# Altium PCB ESP_mudule.pcbdoc (part 1 of 4)
Units mm, origin at the board's own origin, x right, y up, seen from the top; angles counter-clockwise.
Board outline 109.8 x 135.65 mm, 2 copper layers (Top Layer, Bottom Layer); 176 components, 188 nets, 748 pads, 392 vias.
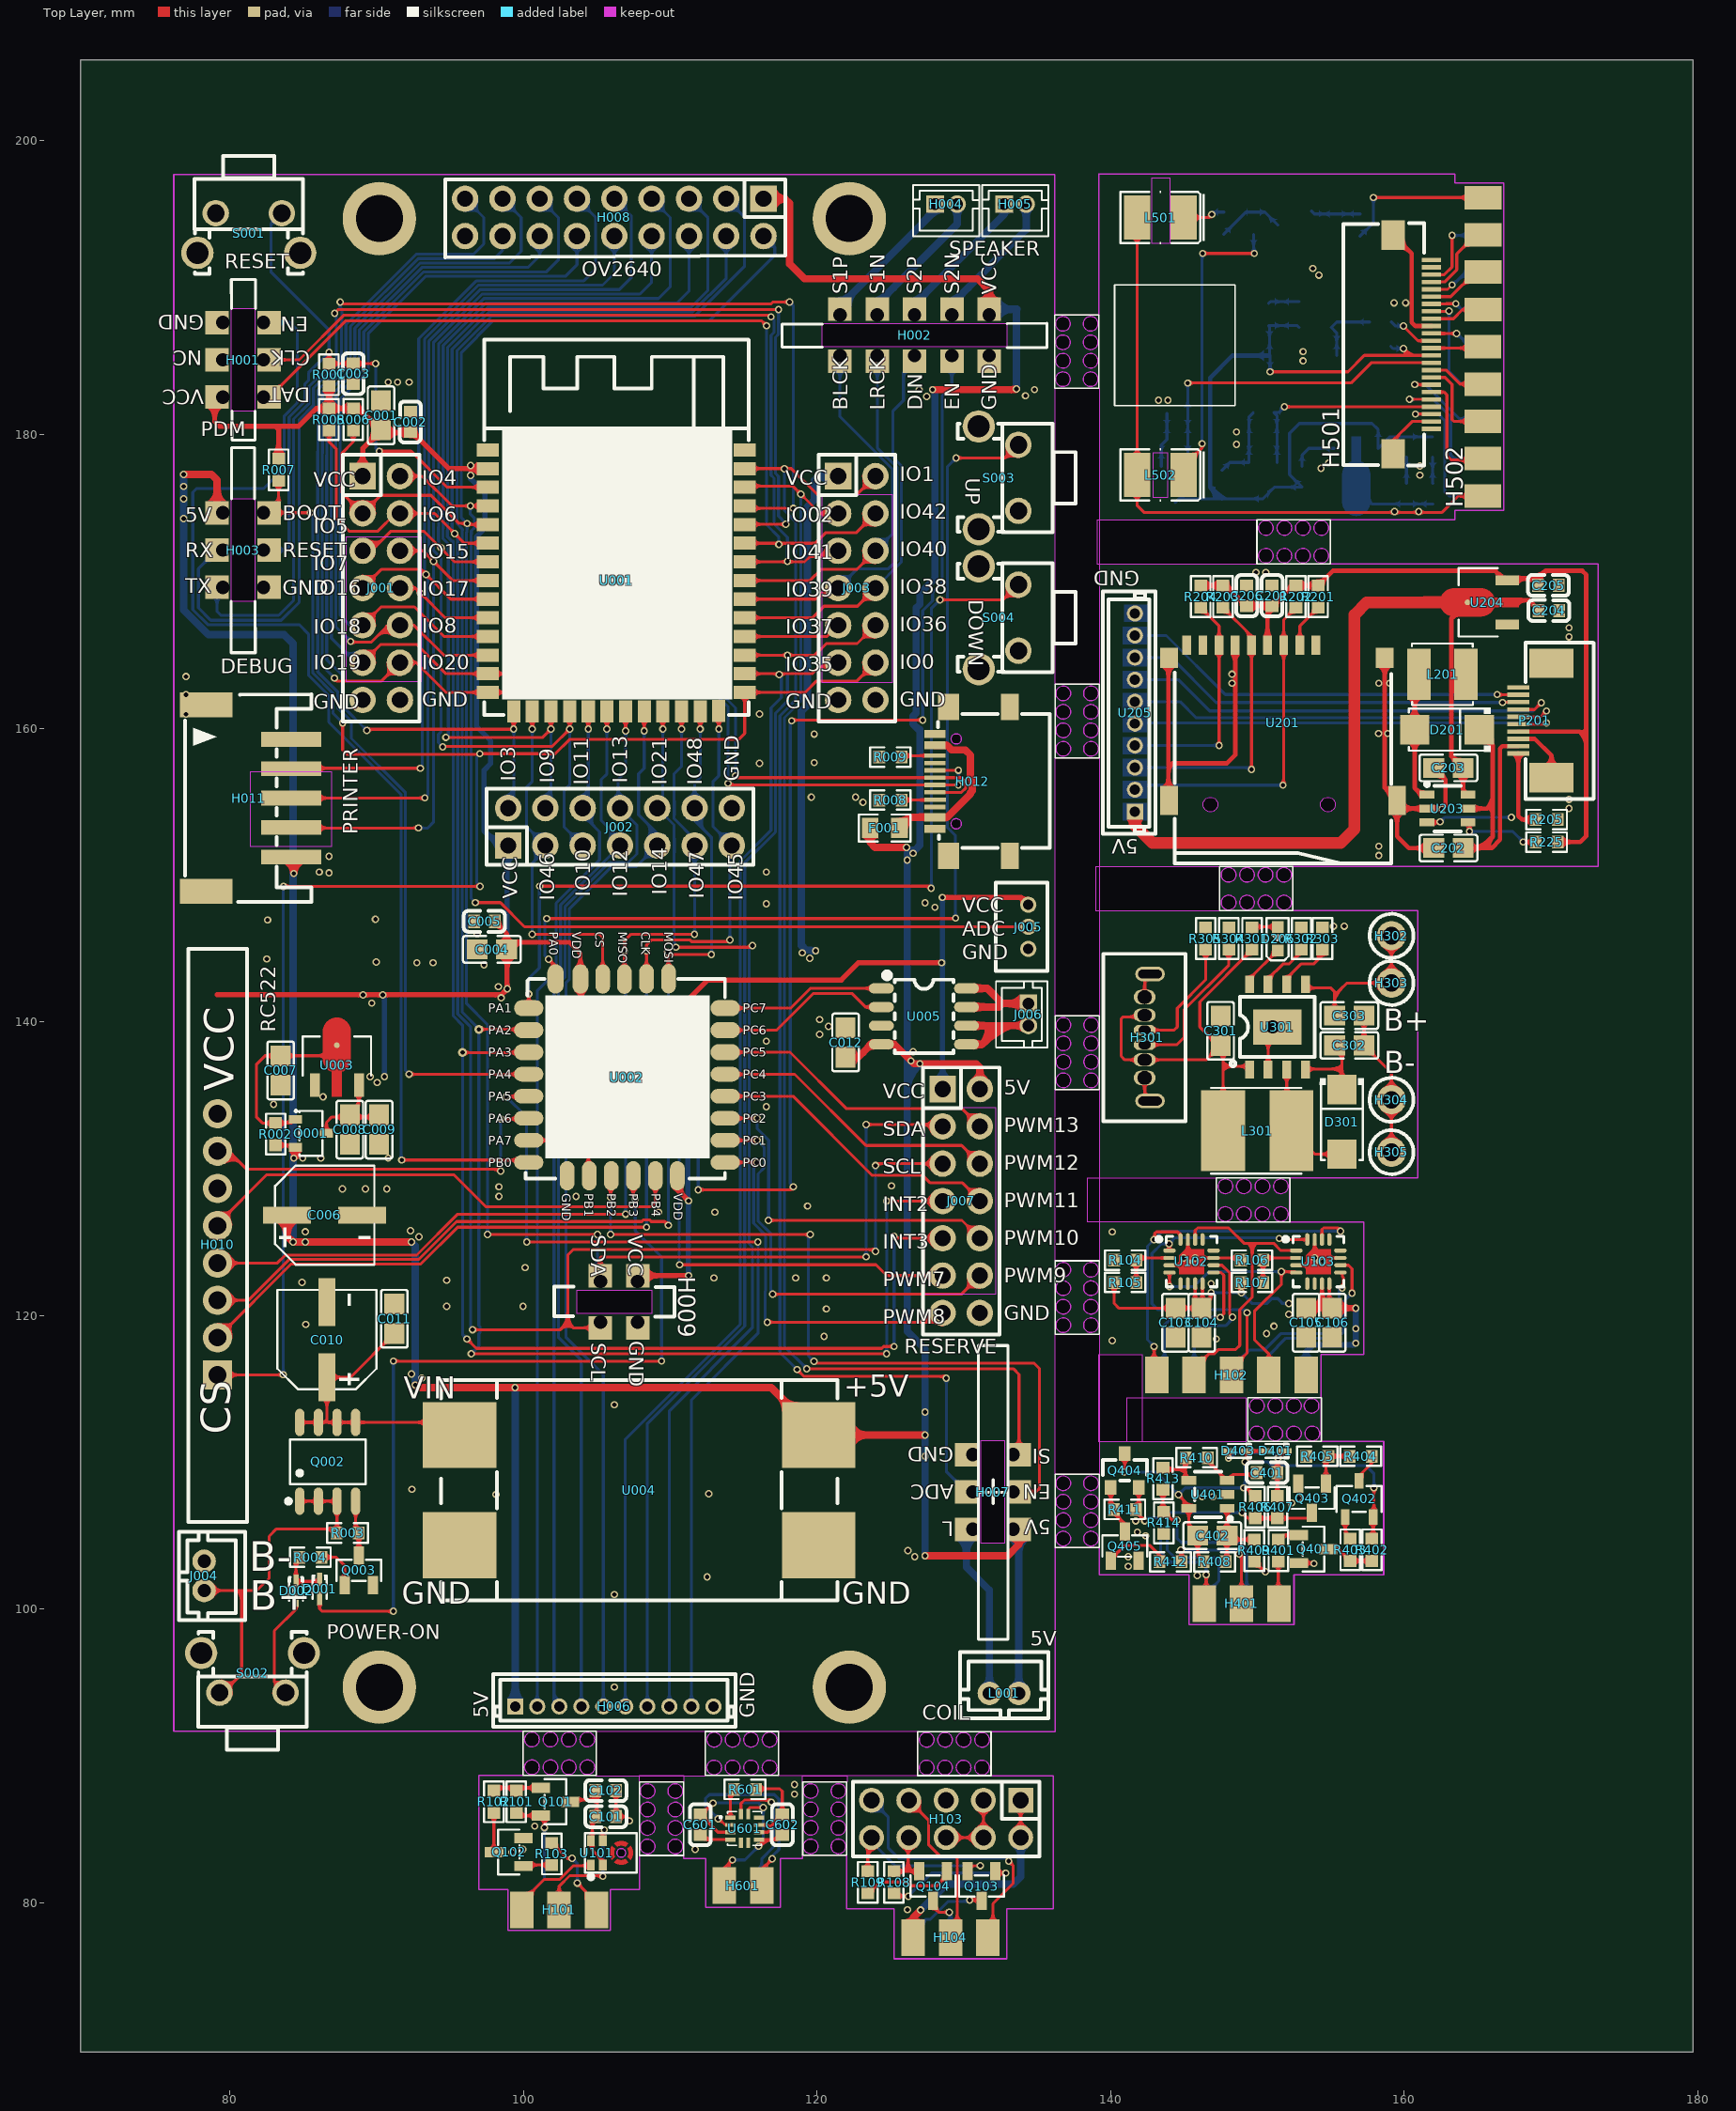
[diagram p0: Top Layer view]
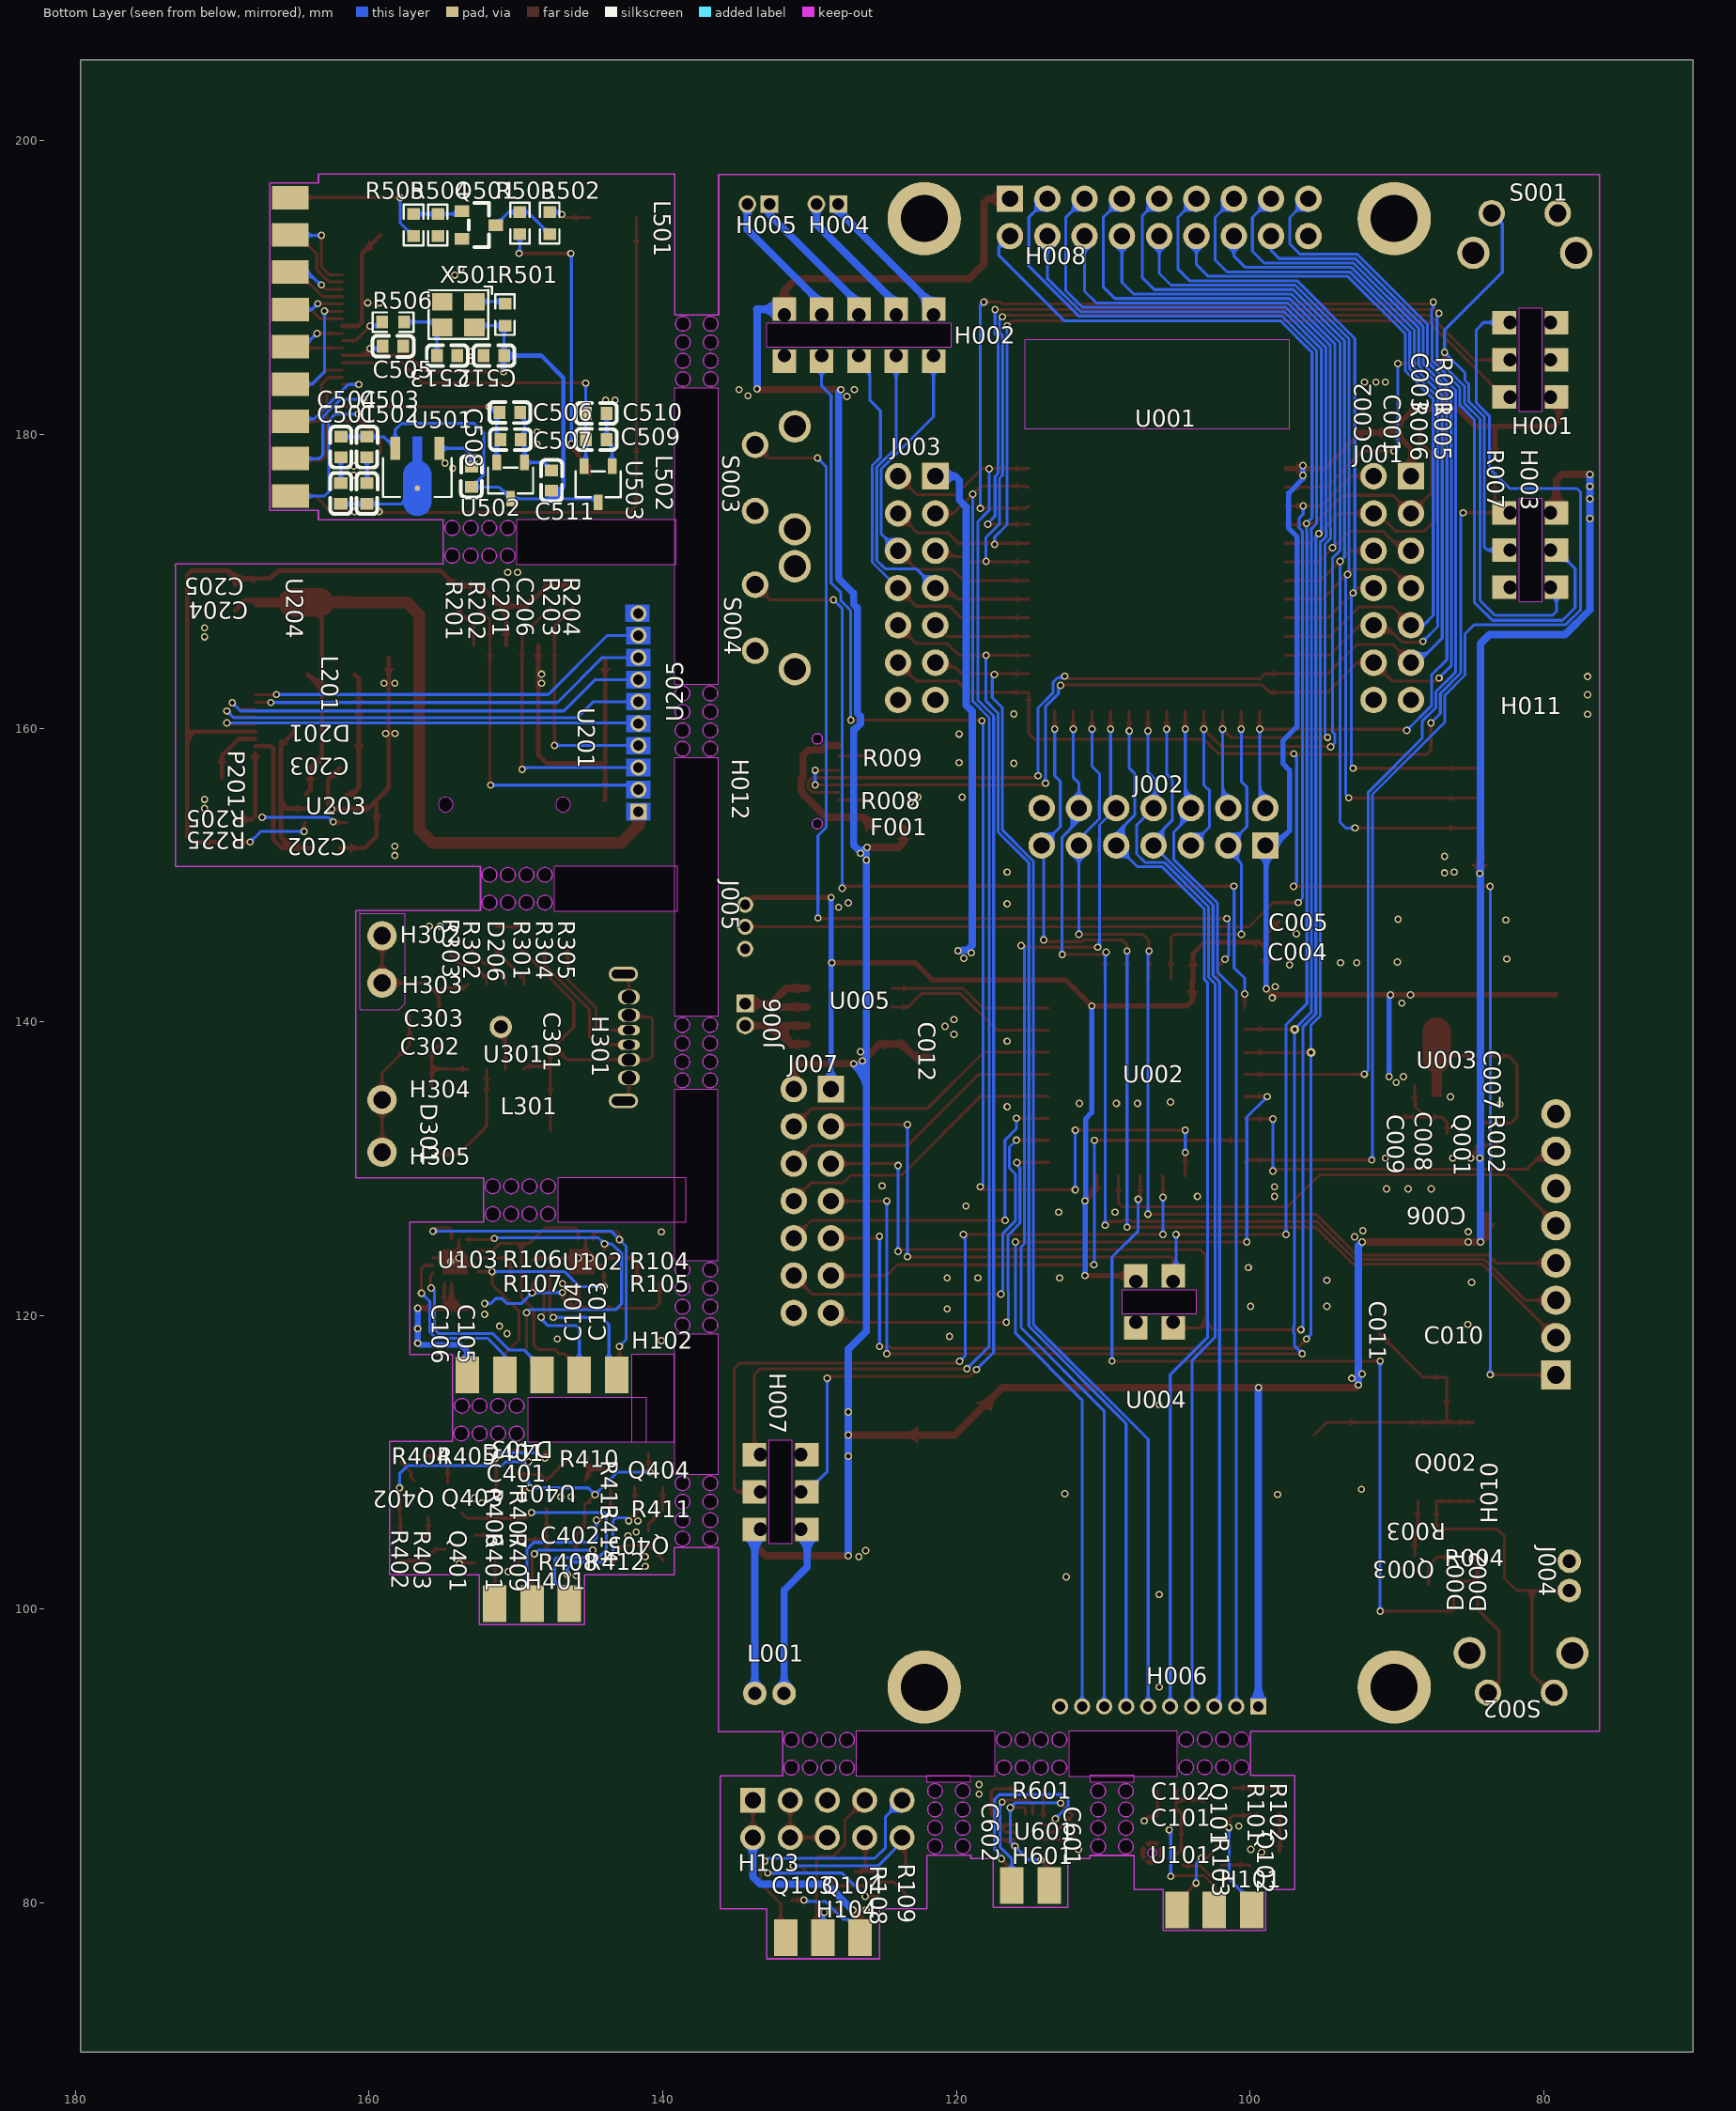
[diagram p1: Bottom Layer view, seen from below]

## Layer stack, top to bottom
Top Layer: signal copper (thickness not stored)
Dielectric: dielectric 0.32, FR-4, Dk 4.8
Bottom Layer: signal copper (thickness not stored)

## Board outline
179.654,69.85 69.85,69.85 69.85,205.503 179.654,205.503
cut-out: 137.249,187.533 cw(c136.749,187.533) 136.249,187.533 cw(c136.749,187.533)
cut-out: 137.249,186.275 cw(c136.749,186.275) 136.249,186.275 cw(c136.749,186.275)
cut-out: 137.249,185.017 cw(c136.749,185.017) 136.249,185.017 cw(c136.749,185.017)
cut-out: 137.249,183.759 cw(c136.749,183.759) 136.249,183.759 cw(c136.749,183.759)
cut-out: 139.139,187.533 cw(c138.639,187.533) 138.139,187.533 cw(c138.639,187.533)
cut-out: 139.139,186.275 cw(c138.639,186.275) 138.139,186.275 cw(c138.639,186.275)
cut-out: 139.139,185.017 cw(c138.639,185.017) 138.139,185.017 cw(c138.639,185.017)
cut-out: 139.139,183.759 cw(c138.639,183.759) 138.139,183.759 cw(c138.639,183.759)
cut-out: 151.07,171.741 cw(c150.57,171.741) 150.07,171.741 cw(c150.57,171.741)
cut-out: 152.328,171.741 cw(c151.828,171.741) 151.328,171.741 cw(c151.828,171.741)
cut-out: 153.586,171.741 cw(c153.086,171.741) 152.586,171.741 cw(c153.086,171.741)
cut-out: 154.844,171.741 cw(c154.344,171.741) 153.844,171.741 cw(c154.344,171.741)
cut-out: 154.844,173.631 cw(c154.344,173.631) 153.844,173.631 cw(c154.344,173.631)
cut-out: 153.586,173.631 cw(c153.086,173.631) 152.586,173.631 cw(c153.086,173.631)
cut-out: 152.328,173.631 cw(c151.828,173.631) 151.328,173.631 cw(c151.828,173.631)
cut-out: 151.07,173.631 cw(c150.57,173.631) 150.07,173.631 cw(c150.57,173.631)
cut-out: 137.268,162.367 cw(c136.768,162.367) 136.268,162.367 cw(c136.768,162.367)
cut-out: 137.268,161.109 cw(c136.768,161.109) 136.268,161.109 cw(c136.768,161.109)
cut-out: 137.268,159.851 cw(c136.768,159.851) 136.268,159.851 cw(c136.768,159.851)
cut-out: 137.268,158.593 cw(c136.768,158.593) 136.268,158.593 cw(c136.768,158.593)
cut-out: 139.158,158.593 cw(c138.658,158.593) 138.158,158.593 cw(c138.658,158.593)
cut-out: 139.158,159.851 cw(c138.658,159.851) 138.158,159.851 cw(c138.658,159.851)
cut-out: 139.158,161.109 cw(c138.658,161.109) 138.158,161.109 cw(c138.658,161.109)
cut-out: 139.158,162.367 cw(c138.658,162.367) 138.158,162.367 cw(c138.658,162.367)
cut-out: 148.529,148.12 cw(c148.029,148.12) 147.529,148.12 cw(c148.029,148.12)
cut-out: 149.787,148.12 cw(c149.287,148.12) 148.787,148.12 cw(c149.287,148.12)
cut-out: 151.045,148.12 cw(c150.545,148.12) 150.045,148.12 cw(c150.545,148.12)
cut-out: 152.303,148.12 cw(c151.803,148.12) 151.303,148.12 cw(c151.803,148.12)
cut-out: 152.303,150.01 cw(c151.803,150.01) 151.303,150.01 cw(c151.803,150.01)
cut-out: 151.045,150.01 cw(c150.545,150.01) 150.045,150.01 cw(c150.545,150.01)
cut-out: 149.787,150.01 cw(c149.287,150.01) 148.787,150.01 cw(c149.287,150.01)
cut-out: 148.529,150.01 cw(c148.029,150.01) 147.529,150.01 cw(c148.029,150.01)
cut-out: 137.284,139.791 cw(c136.784,139.791) 136.284,139.791 cw(c136.784,139.791)
cut-out: 137.284,138.533 cw(c136.784,138.533) 136.284,138.533 cw(c136.784,138.533)
cut-out: 137.284,137.275 cw(c136.784,137.275) 136.284,137.275 cw(c136.784,137.275)
cut-out: 137.284,136.017 cw(c136.784,136.017) 136.284,136.017 cw(c136.784,136.017)
cut-out: 139.174,136.017 cw(c138.674,136.017) 138.174,136.017 cw(c138.674,136.017)
cut-out: 139.174,137.275 cw(c138.674,137.275) 138.174,137.275 cw(c138.674,137.275)
cut-out: 139.174,138.533 cw(c138.674,138.533) 138.174,138.533 cw(c138.674,138.533)
cut-out: 139.174,139.791 cw(c138.674,139.791) 138.174,139.791 cw(c138.674,139.791)
cut-out: 148.316,126.912 cw(c147.816,126.912) 147.316,126.912 cw(c147.816,126.912)
cut-out: 149.574,126.912 cw(c149.074,126.912) 148.574,126.912 cw(c149.074,126.912)
cut-out: 150.832,126.912 cw(c150.332,126.912) 149.832,126.912 cw(c150.332,126.912)
cut-out: 152.09,126.912 cw(c151.59,126.912) 151.09,126.912 cw(c151.59,126.912)
cut-out: 152.09,128.801 cw(c151.59,128.801) 151.09,128.801 cw(c151.59,128.801)
cut-out: 150.832,128.801 cw(c150.332,128.801) 149.832,128.801 cw(c150.332,128.801)
cut-out: 149.574,128.801 cw(c149.074,128.801) 148.574,128.801 cw(c149.074,128.801)
cut-out: 148.316,128.801 cw(c147.816,128.801) 147.316,128.801 cw(c147.816,128.801)
cut-out: 137.268,123.12 cw(c136.768,123.12) 136.268,123.12 cw(c136.768,123.12)
cut-out: 137.268,121.862 cw(c136.768,121.862) 136.268,121.862 cw(c136.768,121.862)
cut-out: 137.268,120.604 cw(c136.768,120.604) 136.268,120.604 cw(c136.768,120.604)
cut-out: 137.268,119.346 cw(c136.768,119.346) 136.268,119.346 cw(c136.768,119.346)
cut-out: 139.157,119.346 cw(c138.657,119.346) 138.157,119.346 cw(c138.657,119.346)
cut-out: 139.157,120.604 cw(c138.657,120.604) 138.157,120.604 cw(c138.657,120.604)
cut-out: 139.157,121.862 cw(c138.657,121.862) 138.157,121.862 cw(c138.657,121.862)
cut-out: 139.157,123.12 cw(c138.657,123.12) 138.157,123.12 cw(c138.657,123.12)
cut-out: 150.458,111.968 cw(c149.958,111.968) 149.458,111.968 cw(c149.958,111.968)
cut-out: 151.716,111.968 cw(c151.216,111.968) 150.716,111.968 cw(c151.216,111.968)
cut-out: 152.974,111.968 cw(c152.474,111.968) 151.974,111.968 cw(c152.474,111.968)
cut-out: 154.232,111.968 cw(c153.732,111.968) 153.232,111.968 cw(c153.732,111.968)
cut-out: 154.181,113.858 cw(c153.681,113.858) 153.181,113.858 cw(c153.681,113.858)
cut-out: 152.974,113.858 cw(c152.474,113.858) 151.974,113.858 cw(c152.474,113.858)
cut-out: 151.716,113.858 cw(c151.216,113.858) 150.716,113.858 cw(c151.216,113.858)
cut-out: 150.458,113.858 cw(c149.958,113.858) 149.458,113.858 cw(c149.958,113.858)
cut-out: 137.268,108.585 cw(c136.768,108.585) 136.268,108.585 cw(c136.768,108.585)
cut-out: 137.268,107.327 cw(c136.768,107.327) 136.268,107.327 cw(c136.768,107.327)
cut-out: 137.268,106.069 cw(c136.768,106.069) 136.268,106.069 cw(c136.768,106.069)
cut-out: 137.268,104.811 cw(c136.768,104.811) 136.268,104.811 cw(c136.768,104.811)
cut-out: 139.157,104.811 cw(c138.657,104.811) 138.157,104.811 cw(c138.657,104.811)
cut-out: 139.157,106.069 cw(c138.657,106.069) 138.157,106.069 cw(c138.657,106.069)
cut-out: 139.157,107.327 cw(c138.657,107.327) 138.157,107.327 cw(c138.657,107.327)
cut-out: 139.157,108.585 cw(c138.657,108.585) 138.157,108.585 cw(c138.657,108.585)
cut-out: 127.966,89.222 cw(c127.466,89.222) 126.966,89.222 cw(c127.466,89.222)
cut-out: 129.224,89.222 cw(c128.724,89.222) 128.224,89.222 cw(c128.724,89.222)
cut-out: 130.482,89.222 cw(c129.982,89.222) 129.482,89.222 cw(c129.982,89.222)
cut-out: 131.74,89.222 cw(c131.24,89.222) 130.74,89.222 cw(c131.24,89.222)
cut-out: 131.74,91.112 cw(c131.24,91.112) 130.74,91.112 cw(c131.24,91.112)
cut-out: 130.482,91.112 cw(c129.982,91.112) 129.482,91.112 cw(c129.982,91.112)
cut-out: 129.224,91.112 cw(c128.724,91.112) 128.224,91.112 cw(c128.724,91.112)
cut-out: 127.966,91.112 cw(c127.466,91.112) 126.966,91.112 cw(c127.466,91.112)
cut-out: 113.497,89.23 cw(c112.997,89.23) 112.497,89.23 cw(c112.997,89.23)
cut-out: 114.755,89.23 cw(c114.255,89.23) 113.755,89.23 cw(c114.255,89.23)
cut-out: 116.013,89.23 cw(c115.513,89.23) 115.013,89.23 cw(c115.513,89.23)
cut-out: 117.271,89.23 cw(c116.771,89.23) 116.271,89.23 cw(c116.771,89.23)
cut-out: 117.271,91.119 cw(c116.771,91.119) 116.271,91.119 cw(c116.771,91.119)
cut-out: 116.013,91.119 cw(c115.513,91.119) 115.013,91.119 cw(c115.513,91.119)
cut-out: 114.755,91.119 cw(c114.255,91.119) 113.755,91.119 cw(c114.255,91.119)
cut-out: 113.497,91.119 cw(c112.997,91.119) 112.497,91.119 cw(c112.997,91.119)
cut-out: 101.088,89.243 cw(c100.588,89.243) 100.088,89.243 cw(c100.588,89.243)
cut-out: 102.346,89.243 cw(c101.846,89.243) 101.346,89.243 cw(c101.846,89.243)
cut-out: 103.604,89.243 cw(c103.104,89.243) 102.604,89.243 cw(c103.104,89.243)
cut-out: 104.862,89.243 cw(c104.362,89.243) 103.862,89.243 cw(c104.362,89.243)
cut-out: 104.862,91.133 cw(c104.362,91.133) 103.862,91.133 cw(c104.362,91.133)
cut-out: 103.604,91.133 cw(c103.104,91.133) 102.604,91.133 cw(c103.104,91.133)
cut-out: 102.346,91.133 cw(c101.846,91.133) 101.346,91.133 cw(c101.846,91.133)
cut-out: 101.088,91.133 cw(c100.588,91.133) 100.088,91.133 cw(c100.588,91.133)
cut-out: 108.962,87.624 cw(c108.462,87.624) 107.962,87.624 cw(c108.462,87.624)
cut-out: 108.962,86.366 cw(c108.462,86.366) 107.962,86.366 cw(c108.462,86.366)
cut-out: 108.962,85.108 cw(c108.462,85.108) 107.962,85.108 cw(c108.462,85.108)
cut-out: 108.962,83.85 cw(c108.462,83.85) 107.962,83.85 cw(c108.462,83.85)
cut-out: 110.852,83.85 cw(c110.352,83.85) 109.852,83.85 cw(c110.352,83.85)
cut-out: 110.852,85.108 cw(c110.352,85.108) 109.852,85.108 cw(c110.352,85.108)
cut-out: 110.852,86.366 cw(c110.352,86.366) 109.852,86.366 cw(c110.352,86.366)
cut-out: 110.852,87.624 cw(c110.352,87.624) 109.852,87.624 cw(c110.352,87.624)
cut-out: 120.076,87.631 cw(c119.576,87.631) 119.076,87.631 cw(c119.576,87.631)
cut-out: 120.076,86.373 cw(c119.576,86.373) 119.076,86.373 cw(c119.576,86.373)
cut-out: 120.076,85.115 cw(c119.576,85.115) 119.076,85.115 cw(c119.576,85.115)
cut-out: 120.076,83.857 cw(c119.576,83.857) 119.076,83.857 cw(c119.576,83.857)
cut-out: 121.965,83.857 cw(c121.465,83.857) 120.965,83.857 cw(c121.465,83.857)
cut-out: 121.965,85.115 cw(c121.465,85.115) 120.965,85.115 cw(c121.465,85.115)
cut-out: 121.965,86.373 cw(c121.465,86.373) 120.965,86.373 cw(c121.465,86.373)
cut-out: 121.965,87.631 cw(c121.465,87.631) 120.965,87.631 cw(c121.465,87.631)
cut-out: 136.218,183.145 139.219,183.145 139.219,162.979 136.218,162.979
cut-out: 139.095,174.191 149.958,174.191 149.958,171.162 139.095,171.162
cut-out: 136.219,157.979 139.235,157.979 139.235,140.403 136.219,140.403
cut-out: 138.993,150.571 147.417,150.571 147.417,147.548 138.993,147.548
cut-out: 136.235,135.403 139.218,135.403 139.218,123.732 136.235,123.732
cut-out: 138.432,129.377 147.164,129.377 147.164,126.383 138.432,126.383
cut-out: 136.218,118.732 139.218,118.732 139.218,109.197 136.218,109.197
cut-out: 139.211,117.353 142.131,117.353 142.131,111.398 139.211,111.398
cut-out: 141.105,114.419 149.22,114.419 149.22,111.398 141.105,111.398
cut-out: 104.976,91.694 112.371,91.694 112.371,88.623 104.976,88.623
cut-out: 107.903,88.674 110.913,88.674 110.913,88.236 107.903,88.236
cut-out: 117.367,91.692 126.854,91.692 126.854,88.673 117.367,88.673
cut-out: 119.026,88.646 122.062,88.646 122.062,88.243 119.026,88.243

## Design rules (kind name [scope] priority, off if disabled: settings)
BoardOutlineClearance copperThickness1oz [All] p0: genericclearance=0.254 ignorepadtopadclearanceinfootprint=FALSE except(0: Arc-SplitContinuation Track-SplitContinuation SMDPad-SplitContinuation THPad-SplitContinuation Via-SplitContinuation Fill-SplitContinuation Poly-SplitContinuation Region-SplitContinuation Text-SplitContinuation; 0.051: Region-CutoutEdge; 0.099: Track-OutlineEdge SMDPad-OutlineEdge THPad-OutlineEdge Via-OutlineEdge Fill-OutlineEdge Track-CutoutEdge SMDPad-CutoutEdge THPad-CutoutEdge Via-CutoutEdge Fill-CutoutEdge; 0.3: Region-OutlineEdge Poly-OutlineEdge Text-OutlineEdge)
Clearance copperThickness1oz [(InNet('GND') OR InNet('VCC') OR InNet('ESP_RESET') OR InNet('ESP_IO4') OR InNet('ESP_IO5') OR InNet('ESP_IO6') OR InNet('ESP_IO7') OR InNet('ESP_IO15') OR InNet('ESP_IO16') OR InNet('ESP_IO17') OR InNet('ESP_IO18') OR InNet('ESP_IO8') OR InNet('ESP_IO19') OR InNet('ESP_IO20') OR InNet('ESP_IO3') OR InNet('ESP_IO46') OR InNet('ESP_IO9') OR InNet('ESP_IO10') OR InNet('ESP_IO11') OR InNet('ESP_IO12') OR InNet('ESP_IO13') OR InNet('ESP_IO14') OR InNet('ESP_IO21') OR InNet('ESP_IO47') OR InNet('ESP_IO48') OR InNet('ESP_IO45') OR InNet('ESP_IO35') OR InNet('ESP_IO36') OR InNet('ESP_IO37') OR InNet('ESP_IO38') OR InNet('ESP_IO39') OR InNet('ESP_IO40') OR InNet('ESP_IO41') OR InNet('ESP_IO42') OR InNet('ESP_RXD') OR InNet('ESP_TXD') OR InNet('ESP_IO2') OR InNet('ESP_IO1') OR InNet('$2N358') OR InNet('MIC_GND') OR InNet('MIC_DAT') OR InNet('MIC_VCC') OR InNet('MIC_CLK') OR InNet('MIC_EN') OR InNet('$2N709') OR InNet('$2N897') OR InNet('$2N810') OR InNet('HT517_VCC') OR InNet('HT517_GND') OR InNet('HT517_BLCK') OR InNet('HT517_LRCK') OR InNet('HT517_DIN') OR InNet('HT517_CN1_P') OR InNet('HT517_CN1_N') OR InNet('HT517_CN2_P') OR InNet('HT517_EN') OR InNet('HT517_CN2_N') OR InNet('$2N2003') OR InNet('$2N2005') OR InNet('I2S_EN') OR InNet('SPK1_N') OR InNet('SPK2_P') OR InNet('SPK2_N') OR InNet('SPK1_P') OR InNet('+5V') OR InNet('PDM_EN') OR InNet('DEBUG_5V0') OR InNet('DEBUG_3V3') OR InNet('DEBUG_GND') OR InNet('DEBUG_RXD') OR InNet('DEBUG_RTS') OR InNet('DEBUG_TXD') OR InNet('DEBUG_DTR') OR InNet('DEBUG_BOOT') OR InNet('DEBUG_RESEST') OR InNet('$2N3190') OR InNet('$2N3194') OR InNet('ESP_BOOT') OR InNet('$1N5617') OR InNet('+12V') OR InNet('P2_GND') OR InNet('P2_LCD_ANODE') OR InNet('$3N1120') OR InNet('P2_LCD_CATHODE') OR InNet('$3N2623') OR InNet('P2_LCD_RESET') OR InNet('P2_LCD_CS') OR InNet('P2_LCD_RS') OR InNet('$4N893') OR InNet('$4N926') OR InNet('$4N908') OR InNet('$4N898') OR InNet('P4_VCC') OR InNet('P4_METAL_EN') OR InNet('P4_METAL_PULSE') OR InNet('P4_METAL_ADC') OR InNet('P4_GND') OR InNet('$4N871') OR InNet('$4N873') OR InNet('$4N875') OR InNet('$4N877') OR InNet('$4N879') OR InNet('$4N1398') OR InNet('$4N1499') OR InNet('$4N903') OR InNet('P4_L_CATHODE') OR InNet('$1N9021') OR InNet('METAL_ENABLE') OR InNet('$1N9696') OR InNet('POWER_LOCK') OR InNet('$1N9668') OR InNet('$1N9369') OR InNet('$1N9446') OR InNet('USB-') OR InNet('USB+') OR InNet('$5N399') OR InNet('VBIN') OR InNet('$5N415') OR InNet('$5N413') OR InNet('$5N401') OR InNet('$5N663') OR InNet('$5N667') OR InNet('$5N418') OR InNet('$5N420') OR InNet('BTN_UP') OR InNet('BTN_DN') OR InNet('CAM_5V0') OR InNet('CAM_GND') OR InNet('CAM_3V3') OR InNet('CAM_2V8') OR InNet('CAM_1V2') OR InNet('$6N2239') OR InNet('CAM_SIOD') OR InNet('CAM_SIOC') OR InNet('CAM_RESET') OR InNet('CAM_VSYNC') OR InNet('CAM_PWDN') OR InNet('CAM_HREF') OR InNet('CAM_D7') OR InNet('CAM_XCLK') OR InNet('CAM_D6') OR InNet('CAM_D5') OR InNet('CAM_PCLK') OR InNet('CAM_D4') OR InNet('CAM_D0') OR InNet('CAM_D3') OR InNet('CAM_D1') OR InNet('CAM_D2') OR InNet('CMA_LIGHT') OR InNet('$6N1779') OR InNet('$6N1805') OR InNet('$6N1887') OR InNet('$6N1935') OR InNet('$6N1076') OR InNet('P0_CMA_LIGHT') OR InNet('P2_5V0') OR InNet('P2_3V3') OR InNet('LCD_RESET') OR InNet('P2_LCD_SCL') OR InNet('P2_LCD_SDA') OR InNet('P2_SD_DAT') OR InNet('P2_SD_CLK') OR InNet('P2_SD_CMD') OR InNet('$3N5060') OR InNet('P6_GND') OR InNet('P6_3V3') OR InNet('SC7A20_SDA') OR InNet('SC7A20_SCL') OR InNet('$7N310') OR InNet('RC522_IRQ') OR InNet('RC522_RST') OR InNet('$1N18402') OR InNet('$1N18392') OR InNet('$1N18404') OR InNet('INT_02') OR InNet('INT_03') OR InNet('PWM_015') OR InNet('PWM_012') OR InNet('PWM_09') OR InNet('PWM_08') OR InNet('PWM_010') OR InNet('PWM_014') OR InNet('PWM_011') OR InNet('PWM_013') OR InNet('PWM_07') OR InNet('$1N20301') OR InNet('$1N20305') OR InNet('$1N20758'))] p1: gap=0.178 ignorepadtopadclearanceinfootprint=FALSE except(0.051: Region-Region; 0.099: Track-Region SMDPad-Region THPad-Region Via-Region Fill-Region Track-Sheet SMDPad-Sheet THPad-Sheet Via-Sheet Fill-Sheet; 0.102: Track-Track; 0.152: Track-SMDPad SMDPad-SMDPad Track-THPad SMDPad-THPad THPad-THPad Track-Via SMDPad-Via THPad-Via Via-Via SMDPad-Fill THPad-Fill Via-Fill Fill-Fill Track-Poly SMDPad-Poly THPad-Poly Via-Poly Fill-Poly Region-Poly Poly-Poly Track-Text SMDPad-Text THPad-Text Via-Text Fill-Text Region-Text Poly-Text Text-Text; 0.175: Track-Hole SMDPad-Hole THPad-Hole Via-Hole Fill-Hole Region-Hole Poly-Hole Text-Hole Sheet-Hole; 0.3: Track-Fill Region-Sheet Poly-Sheet Text-Sheet)
DiffPairsRouting differentialPair [All] p1: maxuncoupledlength=10 minlimit=6 maxlimit=6 mostfreqgap=6 toplayer_minwidth=5 toplayer_prefwidth=10 toplayer_maxwidth=100 bottomlayer_minwidth=5 bottomlayer_prefwidth=10 bottomlayer_maxwidth=100
PasteMaskExpansion pasteMaskExpansion [All] p1: expansion=0
PlaneConnect innerPlane [All] p1: planeconnectstyle=Relief reliefexpansion=0.508 reliefentries=4 reliefconductorwidth=0.254 reliefairgap=0.254
PolygonConnect copperRegion [All] p1: connectstyle=Direct reliefentries=4 reliefconductorwidth=10 polygonreliefangle="90 Angle" airgapwidth=10
RoutingVias viaSize [All] p1: viastyle="Through Hole" holewidth=11.811 minholewidth=11.811 maxholewidth=248.0314 width=19.685 minwidth=19.685 maxwidth=393.7008
SolderMaskExpansion solderMaskExpansion [All] p1: useseparateexpansions=TRUE expansion=2 expansionbottom=2
Width copperThickness1oz [All] p1: maxlimit=100 minlimit=5 preferedwidth=10
Width copperThickness2oz [All] p1: maxlimit=100 minlimit=8 preferedwidth=10

## Components (designator, comment, footprint, x,y, rotation, side; value= is the part's Value field where it differs from the comment)
C001 "CC0805ZKY5V7BB106" C0805 90.316,181.3 r90 top
C002 "100nF" C0603 92.311,180.854 r90 top
C003 "CAP_0603" C0603 88.42,184.134 r90 top
C004 "CC0805ZKY5V7BB106" C0805 97.861,144.934 r0 top
C005 "100nF" C0603 97.353,146.839 r0 top
C006 "100uF" CAP-SMD_BD6.3-L6.6-W6.6-LS7.2-R-RD 86.463,126.842 r180 top
C007 "100nF" C0805 83.474,136.691 r90 top
C008 "10uF" C0805 88.188,132.662 r90 top
C009 "100nF" C0805 90.177,132.662 r90 top
C010 "100uF" CAP-SMD_BD6.3-L6.6-W6.6-LS7.2-R-RD 86.629,118.355 r270 top
C011 "100nF" C0805 91.219,119.784 r270 top
C012 "10uF" C0805 121.948,138.596 r90 top
C101 "200pF" C0603 105.617,85.88 r180 top
C102 "100nF" C0603 105.617,87.658 r180 top
C103 "100nF" C0805 144.418,119.512 r90 top
C104 "22uF" C0805 146.196,119.512 r90 top
C105 "100nF" C0805 153.308,119.512 r90 top
C106 "22uF" C0805 155.086,119.512 r90 top
C201 "10uF" C0603 150.99,169.014 r270 top
C202 "1uF" C0805 163.002,151.835 r0 top
C203 "1uF" C0805 163.002,157.293 r0 top
C204 "1uF" C0603 169.834,168.01 r180 top
C205 "1uF" C0603 169.807,169.724 r180 top
C206 "100nF" C0603 149.267,169.014 r270 top
C301 "10uF" C0805 147.487,139.393 r90 top
C302 "22uF" C0805 156.253,138.394 r0 top
C303 "100uF" C0805 156.253,140.426 r0 top
C401 "CC0805ZKY5V7BB106" C0603 150.651,109.301 r0 top
C402 "47uF" C0805 146.927,105.017 r180 top
C501 "100nF" C0603 161.935,175.969 r270 bottom
C502 "10uF" C0603 160.151,175.969 r270 bottom
C503 "10uF" C0603 160.146,179.144 r90 bottom
C504 "100nF" C0603 161.929,179.144 r90 bottom
C505 "100nF" C0603 158.373,186.002 r0 bottom
C506 "10uF" C0603 150.414,181.487 r180 bottom
C507 "100nF" C0603 150.372,179.652 r180 bottom
C508 "100nF" C0603 153.039,177.112 r270 bottom
C509 "CAP_0603" C0603 144.53,179.652 r180 bottom
C510 "100nF" C0603 144.53,181.43 r180 bottom
C511 "100nF" C0603 147.578,176.858 r270 bottom
C512 "CAP_0603" C0603 151.515,185.367 r0 bottom
C513 "CAP_0603" C0603 154.69,185.367 r0 bottom
C601 "104" C0603 112.049,85.321 r270 top
C602 "104" C0603 117.637,85.321 r270 top
D001 "1N4148WT" SOD-523_L1.2-W0.8-LS1.6-RD 86.134,101.385 r270 top
D002 "1N4148WT" SOD-523_L1.2-W0.8-LS1.6-RD 84.522,101.262 r270 top
D201 "SS14" SMA_L4.3-W2.6-LS5.2-RD 162.9,159.894 r180 top
D206 "LED_0603-R" LED_0603 151.363,145.715 r90 top
D301 "SS34A" SMA_L4.3-W2.6-LS5.2-RD 155.745,133.187 r270 top
D401 "1N4148WT" SOD-523_L1.2-W0.8-LS1.6-RD 151.212,110.78 r180 top
D403 "1N4148WT" SOD-523_L1.2-W0.8-LS1.6-RD 148.662,110.78 r180 top
F001 "3A" R0805 124.615,153.201 r0 top
H001 "PZ254V-12-6P" PDM_MODULE 80.927,185.078 r180 top
H002 "Finger_2*5" I2S_HT517_STEREO 126.647,186.729 r90 top
H003 "PZ254V-12-6P" CH343_DEBUG 80.927,172.124 r0 top
H004 "B2B-ZR(LF)(SN)" CONN-TH_B2B-ZR-LF-SN 128.797,195.682 r180 top
H005 "B2B-ZR(LF)(SN)" CONN-TH_B2B-ZR-LF-SN 133.496,195.682 r180 top
H006 "connector_p10_1.5mm" connector_p10_1.5mm 106.2,93.384 r0 top
H007 "Metal_Detect" Metal_Detect 131.981,107.989 r180 top
H008 "conn-2*9p" connector_p2*9_2.54 106.2,194.775 r180 top
H009 "A2541HWV-2x2P" SC7A20_MODULE 106.2,120.943 r270 top
H010 "RFID_RC522" RFID_RC522 81.181,105.957 r90 top
H011 "HX20007-5AWB" CONN-SMD_5P-P2.00_HX20007-5AWB 81.308,155.233 r270 top
H012 "TYPEC-304S-ACP16" USB-C-SMD_TYPEC-304S-ACP16 130.584,156.376 r90 top
H101 "PZ254V-12-6P" Finger_2*3 99.902,79.53 r0 top
H102 "Finger_2*5" Finger_2*5 143.148,115.956 r0 top
H103 "MTP125-1205S1" HDR-TH_10P-P2.54-V-M-R2-C5-S2.54 128.793,85.725 r180 top
H104 "PZ254V-12-6P" Finger_2*3 126.559,77.648 r0 top
H301 "typec-31-e-11" typec-31-e-11 142.285,138.934 r90 top
H302 "Single_Pin" Single_Pin 159.122,145.858 r0 top
H303 "Single_Pin" Single_Pin 159.122,142.644 r0 top
H304 "Single_Pin" Single_Pin 159.122,134.693 r0 top
H305 "Single_Pin" Single_Pin 159.122,131.123 r0 top
H401 "PZ254V-12-6P" Finger_2*3 146.373,100.388 r0 top
H501 "AFC01-S24FCA-00" FPC-SMD_P0.50-24P_FGS-XJ-H2.0 160.532,186.129 r90 top
H502 "conn-2*9p" Finger_2*9 165.359,180.887 r90 top
H601 "A2541HWV-2x2P" Finger_2*2 113.696,81.183 r0 top
J001 "2.54-2*7P母" HDR-TH_14P-P2.54-V-F-R2-C7-S2.54-1 90.329,169.538 r270 top
J002 "2.54-2*7P母" HDR-TH_14P-P2.54-V-F-R2-C7-S2.54-1 106.585,153.282 r0 top
J003 "2.54-2*7P母" HDR-TH_14P-P2.54-V-F-R2-C7-S2.54-1 122.714,169.538 r270 top
J004 "B2B-ZR(LF)(SN)" connector_p2_2.0mm 78.26,102.274 r270 top
J005 "conn-1*3p" conn-dip-1*3-1.5mm 134.394,146.47 r270 top
J006 "B2B-ZR(LF)(SN)" CONN-TH_B2B-ZR-LF-SN 134.394,140.501 r90 top
J007 "2.54-2*7P母" HDR-TH_14P-P2.54-V-F-R2-C7-S2.54-1 129.822,127.801 r270 top
L001 "300~500uH" connector_p2_2.0mm 132.743,94.273 r0 top
L201 "22uH" IND-SMD_L4.0-W4.0 162.594,163.668 r180 top
L301 "2.2uH" IND-SMD_L5.8-W5.2 149.986,132.584 r0 top
L501 "暖白3528LED灯珠" LED-SMD_L3.6-W2.9-R-RD 143.387,194.765 r180 top
L502 "暖白3528LED灯珠" LED-SMD_L3.6-W2.9-R-RD 143.387,177.239 r180 top
P201 "0.5-10P上接" FPC_0.5_10P_mirror 170.007,160.505 r90 top
Q001 "SS8550" SOT-23-3_L2.9-W1.4-P1.90-LS2.6-BR 85.536,132.407 r180 top
Q002 "AO4407C" SOP-8_L4.9-W3.9-P1.27-LS6.0-BL 86.68,110.042 r0 top
Q003 "SS8050" SOT-23-3_L2.9-W1.3-P1.90-LS2.4-BR 88.801,102.655 r270 top
Q101 "AO3407" SOT-23-3_L2.9-W1.3-P1.90-LS2.4-BR 102.188,86.896 r180 top
Q102 "SS8050" SOT-23-3_L2.9-W1.3-P1.90-LS2.4-BR 99.013,83.467 r0 top
Q103 "SS8050" SOT-23-3_L2.9-W1.3-P1.90-LS2.4-BR 131.206,81.153 r90 top
Q104 "SS8050" SOT-23-3_L2.9-W1.3-P1.90-LS2.4-BR 127.904,81.153 r90 top
Q401 "MMBT3904" SOT-23-3_L2.9-W1.3-P1.90-LS2.4-BR 153.813,104.099 r180 top
Q402 "MMBT3906-7-F" SOT-23-3_L2.9-W1.6-P1.90-LS2.8-BR 156.924,107.516 r270 top
Q403 "AO3402A" SOT-23-3_L2.9-W1.3-P1.90-LS2.4-BR 153.711,107.567 r90 top
Q404 "AO3401A_C347476" SOT-23_L2.9-W1.3-P1.90-LS2.4-BR 140.961,109.454 r270 top
Q405 "MMBT3904" SOT-23-3_L2.9-W1.3-P1.90-LS2.4-BR 140.961,104.303 r270 top
Q501 "AO3404A" SOT-23_L2.9-W1.3-P1.90-LS2.4-BR 152.531,194.257 r0 bottom
R001 "10K" R0603 86.769,184.062 r270 top
R002 "10" R0603 83.139,132.356 r90 top
R003 "10K" R0603 88.039,105.195 r180 top
R004 "1K" R0603 85.499,103.544 r180 top
R005 "10K" R0603 86.769,181.014 r90 top
R006 "10K" R0603 88.42,181.014 r90 top
R007 "10K" R0603 83.34,177.585 r90 top
R008 "5.1K" R0603 124.996,155.106 r0 top
R009 "5.1K" R0603 124.996,158.027 r0 top
R101 "Res_0603" R0603 99.521,86.896 r270 top
R102 "Res_0603" R0603 97.997,86.896 r90 top
R103 "Res_0603" R0603 101.934,83.34 r90 top
R104 "NC" R0603 140.989,123.777 r180 top
R105 "NC" R0603 140.989,122.253 r180 top
R106 "NC" R0603 149.625,123.777 r180 top
R107 "NC" R0603 149.625,122.253 r180 top
R108 "10K" R0603 125.237,81.407 r270 top
R109 "10K" R0603 123.459,81.407 r270 top
R201 "10K" R0603 154.132,168.958 r270 top
R202 "10K" R0603 152.614,168.958 r90 top
R203 "10K" R0603 147.649,168.958 r90 top
R204 "10K" R0603 146.131,168.958 r90 top
R205 "5.1R" R0603 169.683,153.774 r180 top
R225 "0" R0603 169.683,152.243 r180 top
R301 "1K" R0603 149.629,145.667 r270 top
R302 "10K" R0603 152.995,145.667 r270 top
R303 "10K" R0603 154.423,145.667 r270 top
R304 "5.1K" R0603 148.048,145.667 r270 top
R305 "5.1K" R0603 146.467,145.667 r270 top
R401 "1K" R0603 151.416,103.997 r90 top
R402 "6.8K" R0603 157.791,104.048 r90 top
R403 "1K" R0603 156.312,104.048 r90 top
R404 "100" R0603 157.026,110.423 r0 top
R405 "150" R0603 154.068,110.423 r0 top
R406 "390" R0603 149.835,106.955 r90 top
R407 "390" R0603 151.365,106.955 r270 top
R408 "47K" R0603 147.08,103.232 r0 top
R409 "62K" R0603 149.784,103.997 r270 top
R410 "2M" R0603 145.857,110.321 r0 top
R411 "10K" R0603 140.961,106.802 r180 top
R412 "1K" R0603 144.072,103.232 r180 top
R413 "4.7K" R0603 143.562,108.893 r90 top
R414 "5.1K" R0603 143.613,105.884 r90 top
R501 "Res_0603" R0603 150.753,188.161 r270 bottom
R502 "100" R0603 147.705,194.384 r90 bottom
R503 "100" R0603 149.737,194.384 r270 bottom
R504 "10K" R0603 155.325,194.257 r90 bottom
R505 "10" R0603 156.976,194.257 r270 bottom
R506 "33" R0603 158.373,187.653 r180 bottom
R601 "2R2" R0603 115.097,87.734 r180 top
S001 "TC-1102N-C-A-B" SW-TH_TC-1102N-C-A-B 81.308,193.714 r180 top
S002 "TC-1102N-C-A-B" SW-TH_TC-1102N-C-A-B 81.562,95.67 r0 top
S003 "TC-1102N-C-A-B" SW-TH_TC-1102N-C-A-B 132.369,177.044 r90 top
S004 "TC-1102N-C-A-B" SW-TH_TC-1102N-C-A-B 132.369,167.519 r90 top
U001 "ESP32-S3-WROOM-1U" ESP32-S3-WROOM-1U 106.458,170.046 r0 top
U002 "GPBA02B-C" GPBA02B-C 108.232,135.929 r0 top
U003 "ME6206A33PG" SOT-89-3_L4.5-W2.5-P1.50-LS4.2-BR 87.304,137.05 r270 top
U004 "CX8823_5V" CX8823_MO 94.389,115.609 r0 top
U005 "AM2837" sop-8_l5.0-w4.0-p1.27-ls6.2-bl 127.282,140.374 r270 top
U101 "SD18OB261-104" SD18OB261-104 104.601,82.578 r0 top
U102 "HT517" QFN-16_L3.0-W3.0-P0.50-TL-EP1.7 145.506,123.676 r0 top
U103 "HT517" QFN-16_L3.0-W3.0-P0.50-TL-EP1.7 154.142,123.676 r0 top
U201 "TF-01A" TF-01A 151.742,158.473 r0 top
U203 "MT9201" SOT-23-6_L2.9-W1.6-P0.95-LS2.8-BR 162.937,154.527 r180 top
U204 "ME6206A33PG" SOT-89-3_L4.5-W2.5-P1.50-LS4.2-BR 165.654,168.564 r0 top
U205 "connector_p10_1.5mm" connector_p10_1.5mm 141.658,161.056 r90 top
U301 "CS5095E" ESOP-8_L4.9-W3.9-P1.27-LS6.0-BL-EP 151.357,139.653 r0 top
U401 "LM321-TR" SOT-23-5_L3.0-W1.7-P0.95-LS2.8-BR 146.621,107.822 r0 top
U501 "ME6206A33PG" SOT-89-3_L4.5-W2.5-P1.50-LS4.2-BR 156.723,177.693 r90 bottom
U502 "XC6206-2.8V" SOT-23-3_L2.9-W1.6-P1.90-LS2.8-BR 150.372,176.858 r90 bottom
U503 "XC6206-2.8V" SOT-23-3_L2.9-W1.6-P1.90-LS2.8-BR 144.403,176.604 r90 bottom
U601 "SC7A20HTR" LGA-12_L2.0-W2.0-P0.50-TL 115.097,85.067 r0 top
X501 "OT2EL4C4JI-111OLP-24M" OSC-SMD_4P-L3.2-W2.5-BL 153.928,188.161 r0 bottom

## Footprints (in the part's own frame and the unit in brackets; to place one, negate y for a bottom-side part, rotate by r counter-clockwise, add the part's x,y. Pads: shape width x height; smd on the part's side, far side on the other; paste and mask are expansions set on the pad)
C0603 [mm]
  rect 0.8x0.9 smd: 1(-0.7,0) 2(0.7,0)
  silkscreen extent -1.41,-0.71 1.39,0.72
C0805 [mm]
  rect 1.41x1.35 smd: 1(-1,0) 2(1,0)
  silkscreen extent -1.96,-0.9 1.96,0.9
CAP-SMD_BD6.3-L6.6-W6.6-LS7.2-R-RD [mm]
  rect 3.26x1.15 smd: 1(2.555,0) 2(-2.555,0)
  silkscreen extent -3.39,-3.38 3.36,3.38
CH343_DEBUG [mm]
  rect 1.6x1.6 hole 0.914 copper offset -0.4,0: 1(-1.378,2.54) 3(-1.378,0) 5(-1.378,-2.54)
  rect 1.6x1.6 hole 0.914 copper offset 0.4,0: 2(1.378,2.54) 4(1.378,0) 6(1.378,-2.54)
  Board Outline Layer lines w0.025: -0.8,-3.5 0.8,-3.5 0.8,3.5 -0.8,3.5 -0.8,-3.5
  Board Outline Layer region: -0.8,3.5 0.8,3.5 0.8,-3.5 -0.8,-3.5
  Multi-Layer board cut-out: -0.8,3.5 0.8,3.5 0.8,-3.5 -0.8,-3.5
  silkscreen extent -0.83,-6.98 0.82,6.98
conn-dip-1*3-1.5mm [mil]
  round 43.3 hole 27.6: 1(-59,0) 2(0,0) 3(59,0)
  silkscreen extent -118,-87 118,51
CONN-SMD_5P-P2.00_HX20007-5AWB [mil]
  rect 39.4x161.4 smd: 1(-157.5,114.2) 2(-78.7,114.2) 3(0,114.2) 4(78.7,114.2) 5(157.5,114.2)
  rect 66.9x141.7 smd: 6(250,-114.2) 7(-250,-114.2)
  silkscreen extent -279,-171 278,168
CONN-TH_B2B-ZR-LF-SN [mm]
  rect 1.2x1.2 hole 0.8: 1(0.75,0.001)
  round 1.2 hole 0.8: 2(-0.75,-0.001)
  silkscreen extent -2.25,-1.3 2.25,2.2
connector_p2*9_2.54 [mm]
  rect 1.801x1.801 hole 1.1: 1(-10.16,-1.27)
  round 1.801 hole 1.1: 2(-10.16,1.27) 3(-7.62,-1.27) 4(-7.62,1.27) 5(-5.08,-1.27) 6(-5.08,1.27) 7(-2.54,-1.27) 8(-2.54,1.27) 9(0,-1.27) 10(0,1.27) 11(2.54,-1.27) 12(2.54,1.27) 13(5.08,-1.27) 14(5.08,1.27) 15(7.62,-1.27) 16(7.62,1.27) 17(10.16,-1.27) 18(10.16,1.27)
  silkscreen extent -11.63,-2.6 11.5,2.73
connector_p2_2.0mm [mil]
  round 63 hole 35.4: 1(39.4,0.18) 2(-39.4,0.18)
  silkscreen extent -118,-67 118,110
connector_p10_1.5mm [mil]
  rect 43.3x43.3 hole 27.6: 1(-265.7,0.03)
  round 43.3 hole 27.6: 2(-206.7,0.03) 3(-147.6,0.03) 4(-88.6,0.03) 5(-29.5,0.03) 6(29.5,0.03) 7(88.6,0.03) 8(147.6,0.03) 9(206.7,0.03) 10(265.8,0.03)
  silkscreen extent -325,-55 325,87
CX8823_MO [mm]
  rect 5x4.5 smd: 1(1.27,-3.75) 2(25.73,-3.75) 3(1.27,-11.25) 4(25.73,-11.25)
  silkscreen extent 0,-15 27,0
ESOP-8_L4.9-W3.9-P1.27-LS6.0-BL-EP [mm]
  rect 0.6x1.2 smd: 1(-1.905,-2.908) 2(-0.635,-2.908) 3(0.635,-2.908) 4(1.905,-2.908) 5(1.905,2.908) 6(0.635,2.908) 7(-0.635,2.908) 8(-1.905,2.908)
  rect 3.3x2.4 smd: 9(0,0)
  silkscreen extent -3.2,-2.67 2.55,2.05
ESP32-S3-WROOM-1U [mm]
  rect 1.5x0.9 smd: 1(-8.877,8.895) 2(-8.877,7.625) 3(-8.877,6.355) 4(-8.877,5.085) 5(-8.877,3.815) 6(-8.877,2.545) 7(-8.877,1.275) 8(-8.877,0.005) 9(-8.877,-1.265) 10(-8.877,-2.535) 11(-8.877,-3.805) 12(-8.877,-5.075) 13(-8.877,-6.345) 14(-8.877,-7.615) 27(8.623,-7.615) 28(8.623,-6.345) 29(8.623,-5.075) 30(8.623,-3.805) 31(8.623,-2.535) 32(8.623,-1.265) 33(8.623,0.005) 34(8.623,1.275) 35(8.623,2.545) 36(8.623,3.815) 37(8.623,5.085) 38(8.623,6.355) 39(8.623,7.625) 40(8.623,8.895)
  rect 0.9x1.5 smd: 15(-7.112,-8.895) 16(-5.842,-8.895) 17(-4.572,-8.895) 18(-3.302,-8.895) 19(-2.032,-8.895) 20(-0.762,-8.895) 21(0.508,-8.895) 22(1.778,-8.895) 23(3.048,-8.895) 24(4.318,-8.895) 25(5.588,-8.895) 26(6.858,-8.865)
  rect 0.9x0.9 smd: 41(-3.027,-0.225) 41(-3.027,1.175) 41(-3.027,2.575) 41(-1.627,-0.225) 41(-1.627,1.175) 41(-1.627,2.575) 41(-0.227,-0.225) 41(-0.227,1.175) 41(-0.227,2.575)
  silkscreen extent -9.13,-9.14 8.89,16.39
Finger_2*2 [mm]
  rect 1.6x2.5 smd: 1(0,0.006) 3(2.54,0.006)
  rect 1.6x2.5 smd far side: 2(0,0) 4(2.54,0)
Finger_2*3 [mm]
  rect 1.6x2.5 smd: 1(0,0) 3(2.54,0) 5(5.08,0)
  rect 1.6x2.5 smd far side: 2(0,-0.006) 4(2.54,-0.006) 6(5.08,-0.006)
Finger_2*5 [mm]
  rect 1.6x2.5 smd: 1(0,0) 3(2.54,0) 5(5.08,0) 7(7.62,0) 9(10.16,0)
  rect 1.6x2.5 smd far side: 2(0,-0.006) 4(2.54,-0.006) 6(5.08,-0.006) 8(7.62,-0.006) 10(10.16,-0.006)
Finger_2*9 [mm]
  rect 1.6x2.5 smd: 1(-5.08,0.006) 3(-2.54,0.006) 5(0,0.006) 7(2.54,0.006) 9(5.08,0.006) 11(7.62,0) 13(10.16,0) 15(12.7,0) 17(15.24,0)
  rect 1.6x2.5 smd far side: 2(-5.08,0) 4(-2.54,0) 6(0,0) 8(2.54,0) 10(5.08,0) 12(7.62,0) 14(10.16,-0.006) 16(12.7,-0.006) 18(15.24,-0.006)
FPC-SMD_P0.50-24P_FGS-XJ-H2.0 [mm]
  rect 0.3x1.3 smd: 1(-5.748,-1.301) 2(-5.248,-1.301) 3(-4.748,-1.301) 4(-4.248,-1.301) 5(-3.748,-1.301) 6(-3.248,-1.301) 7(-2.748,-1.301) 8(-2.248,-1.301) 9(-1.748,-1.301) 10(-1.248,-1.301) 11(-0.748,-1.301) 12(-0.248,-1.301) 13(0.252,-1.301) 14(0.752,-1.301) 15(1.252,-1.301) 16(1.752,-1.301) 17(2.252,-1.301) 18(2.752,-1.301) 19(3.252,-1.301) 20(3.752,-1.301) 21(4.252,-1.301) 22(4.752,-1.301) 23(5.252,-1.301) 24(5.752,-1.301)
  rect 2x1.6 smd: 25(7.45,1.301) 26(-7.45,1.301)
  silkscreen extent -8.25,-0.8 8.25,4.7
FPC_0.5_10P_mirror [mil]
  rect 11.8x59.1 smd: 1(-88,88.57) 2(-68.4,88.57) 3(-48.7,88.57) 4(-29,88.57) 5(-9.3,88.57) 6(10.4,88.57) 7(30.1,88.57) 8(49.8,88.57) 9(69.4,88.57) 10(89.1,88.57)
  rect 78.7x118.1 smd: 11(-152.9,-0.43) 12(154.3,-0.23)
  silkscreen extent -210,-113 210,69
GPBA02B-C [mm]
  oval 1.1x2 smd: 2(-6.041,6.993) 35(-4.341,6.983)
  oval 2x1.1 smd: 3(-7.861,5.003) 4(-7.861,3.503) 5(-7.861,2.003) 25(5.519,2.003) 26(5.519,3.503) 27(5.519,5.003)
  oval 2x1 smd: 6(-7.861,0.503) 7(-7.861,-0.997) 8(-7.861,-2.497) 9(-7.861,-3.997) 10(-7.861,-5.497) 20(5.519,-5.497) 21(5.519,-3.997) 22(5.519,-2.497) 23(5.519,-0.997) 24(5.519,0.503)
  oval 1x2 smd: 11(-5.241,-6.417) 12(-3.741,-6.417) 13(-2.241,-6.417) 14(-0.741,-6.417) 15(0.759,-6.417) 17(2.259,-6.417) 30(1.659,7.006) 31(0.159,7.003) 32(-1.341,6.973) 33(-2.821,6.983)
  silkscreen extent -8.09,-6.59 5.5,7
HDR-TH_10P-P2.54-V-M-R2-C5-S2.54 [mm]
  rect 1.7x1.7 hole 1.1: 1(-5.08,-1.27)
  round 1.7 hole 1.1: 2(-5.08,1.27) 3(-2.54,-1.27) 4(-2.54,1.27) 5(0,-1.27) 6(0,1.27) 7(2.54,-1.27) 8(2.54,1.27) 9(5.08,-1.27) 10(5.08,1.27)
  silkscreen extent -6.35,-2.54 6.35,2.54
HDR-TH_14P-P2.54-V-F-R2-C7-S2.54-1 [mm]
  rect 1.801x1.801 hole 1.1: 1(-7.62,-1.27)
  round 1.801 hole 1.1: 2(-7.62,1.27) 3(-5.08,-1.27) 4(-5.08,1.27) 5(-2.54,-1.27) 6(-2.54,1.27) 7(0,-1.27) 8(0,1.27) 9(2.54,-1.27) 10(2.54,1.27) 11(5.08,-1.27) 12(5.08,1.27) 13(7.62,-1.27) 14(7.62,1.27)
  silkscreen extent -9.09,-2.6 9.09,2.6
I2S_HT517_STEREO [mm]
  rect 1.6x1.6 hole 0.914 copper offset -0.4,0: 1(-1.359,5.08) 3(-1.359,2.54) 5(-1.359,0) 7(-1.359,-2.54) 9(-1.359,-5.08)
  rect 1.6x1.6 hole 0.914 copper offset 0.4,0: 2(1.397,5.08) 4(1.397,2.54) 6(1.397,0) 8(1.397,-2.54) 10(1.397,-5.08)
  Board Outline Layer lines w0.025: -0.781,6.294 0.819,6.294 0.819,-6.294 -0.781,-6.294 -0.781,6.294
  Board Outline Layer region: -0.781,6.294 0.819,6.294 0.819,-6.294 -0.781,-6.294
  Multi-Layer board cut-out: -0.781,6.294 0.819,6.294 0.819,-6.294 -0.781,-6.294
  silkscreen extent -0.81,-9.02 0.83,9.02
IND-SMD_L4.0-W4.0 [mil]
  rect 63x137.8 smd: 1(-63,0) 2(63,0)
  silkscreen extent -82,-83 82,83
IND-SMD_L5.8-W5.2 [mm]
  rect 3x5.5 smd: 1(2.325,0) 2(-2.325,0)
  silkscreen extent -3.15,-2.92 3,2.92
LED-SMD_L3.6-W2.9-R-RD [mm]
  rect 1.785x3.024 smd: 1(1.592,0) 2(-1.592,0)
  silkscreen extent -3.02,-1.78 2.71,1.78
LED_0603 [mil]
  rect 31.5x31.5 smd: 1(-33.5,-0.4) 2(29.5,-0.2)
  silkscreen extent -61,-30 53,30
LGA-12_L2.0-W2.0-P0.50-TL [mm]
  rect 0.7x0.28 smd: 1(-1.001,0.75) 2(-1.001,0.25) 3(-1.001,-0.25) 4(-1.001,-0.75) 7(0.948,-0.75) 8(0.948,-0.25) 9(0.948,0.25) 10(0.948,0.75)
  rect 0.28x0.7 smd: 5(-0.276,-0.975) 6(0.224,-0.975) 11(0.224,0.975) 12(-0.276,0.975)
  silkscreen extent -1.73,-1.15 1.13,1.15
Metal_Detect [mm]
  rect 1.6x1.6 hole 0.914 copper offset -0.4,0: 1(-1.378,2.54) 3(-1.378,0) 5(-1.378,-2.54)
  rect 1.6x1.6 hole 0.914 copper offset 0.4,0: 2(1.378,2.54) 4(1.378,0) 6(1.378,-2.54)
  Board Outline Layer lines w0.025: 0.8,3.5 -0.8,3.5 -0.8,-3.5 0.8,-3.5 0.8,3.5
  Board Outline Layer region: -0.8,3.5 0.8,3.5 0.8,-3.5 -0.8,-3.5
  Multi-Layer board cut-out: -0.8,3.5 0.8,3.5 0.8,-3.5 -0.8,-3.5
  silkscreen extent -1.02,-9.97 0.98,10.03
OSC-SMD_4P-L3.2-W2.5-BL [mm]
  rect 1.4x1.2 smd: 1(-1.1,-0.875) 2(1.1,-0.875) 3(1.1,0.875) 4(-1.1,0.875)
  silkscreen extent -2.29,-1.9 2.03,1.65
PDM_MODULE [mm]
  rect 1.6x1.6 hole 0.914 copper offset -0.4,0: 1(-1.378,2.54) 3(-1.378,0) 5(-1.378,-2.54)
  rect 1.6x1.6 hole 0.914 copper offset 0.4,0: 2(1.378,2.54) 4(1.378,0) 6(1.378,-2.54)
  Board Outline Layer lines w0.025: 0.8,3.5 -0.8,3.5 -0.8,-3.5 0.8,-3.5 0.8,3.5
  Board Outline Layer region: -0.8,3.5 0.8,3.5 0.8,-3.5 -0.8,-3.5
  Multi-Layer board cut-out: -0.8,3.5 0.8,3.5 0.8,-3.5 -0.8,-3.5
  silkscreen extent -0.83,-5.46 0.81,5.46
QFN-16_L3.0-W3.0-P0.50-TL-EP1.7 [mil]
  oval 33.5x11 smd: 1(-59.1,29.5) 2(-59.1,9.8) 3(-59.1,-9.8) 4(-59.1,-29.5) 9(59.1,-29.5) 10(59.1,-9.8) 11(59.1,9.8) 12(59.1,29.5)
  oval 11x33.5 smd: 5(-29.5,-59.1) 6(-9.8,-59.1) 7(9.8,-59.1) 8(29.5,-59.1) 13(29.5,59.1) 14(9.8,59.1) 15(-9.8,59.1) 16(-29.5,59.1)
  round 13.4 smd: 17(0,0)
  Top Layer region: 33.5,33.5 33.5,-33.5 -33.5,-33.5 -33.5,16.7 -16.7,33.5
  silkscreen extent -94,-68 68,68
R0603 [mm]
  rect 0.806x0.864 smd: 1(-0.753,0) 2(0.753,0)
  silkscreen extent -1.39,-0.66 1.39,0.66
R0805 [mm]
  rect 1.133x1.377 smd: 1(-1,0) 2(1,0)
  silkscreen extent -1.76,-0.92 1.76,0.92
RFID_RC522 [mm]
  rect 2x2 hole 1.2: 1(10,2)
  round 2 hole 1.2: 2(12.54,2) 3(15.08,2) 4(17.62,2) 5(20.16,2) 6(22.7,2) 7(25.24,2) 8(27.78,2)
  silkscreen extent 0,0 39,4
SC7A20_MODULE [mm]
  rect 1.6x1.6 hole 0.914 copper offset -0.4,0: 1(-1.378,1.59) 3(-1.378,-0.95)
  rect 1.6x1.6 hole 0.914 copper offset 0.4,0: 2(1.378,1.59) 4(1.378,-0.95)
  Board Outline Layer lines w0.025: 0.8,-2.55 0.8,2.55 -0.8,2.55 -0.8,-2.55 0.8,-2.55
  Board Outline Layer region: -0.8,2.55 0.8,2.55 0.8,-2.55 -0.8,-2.55
  Multi-Layer board cut-out: -0.8,2.55 0.8,2.55 0.8,-2.55 -0.8,-2.55
  silkscreen extent -1.02,-4.1 1.02,4.1
SD18OB261-104 [mm]
  rect 0.52x0.73 smd: 1(0,0) 2(0.82,0) 4(0.82,1.67) 5(0,1.67)
  Top Layer region: 1.436,0.348 1.651,0.563 1.651,0.563 1.635,0.59 1.62,0.619 1.607,0.648 1.596,0.678 1.587,0.709 1.58,0.74 1.575,0.771 1.571,0.803 1.57,0.835 1.571,0.867 1.575,0.899 1.58,0.931 1.587,0.962 1.596,0.992 1.607,1.022 1.62,1.052 1.635,1.08 1.651,1.107 1.436,1.322 1.436,1.322 1.411,1.288 1.388,1.253 1.368,1.217 1.349,1.18 1.331,1.141 1.316,1.102 1.303,1.062 1.293,1.022 1.284,0.981 1.277,0.94 1.273,0.898 1.271,0.856 1.271,0.814 1.273,0.772 1.277,0.731 1.284,0.689 1.293,0.648 1.303,0.608 1.316,0.568 1.331,0.529 1.349,0.491 1.368,0.453 1.388,0.417 1.411,0.382 1.436,0.348
  Top Layer region: 1.583,1.47 1.798,1.255 1.798,1.254 1.825,1.271 1.854,1.286 1.883,1.299 1.913,1.31 1.944,1.319 1.975,1.326 2.006,1.331 2.038,1.334 2.07,1.335 2.102,1.334 2.134,1.331 2.166,1.326 2.197,1.319 2.227,1.31 2.257,1.299 2.287,1.286 2.315,1.271 2.342,1.254 2.557,1.469 2.557,1.47 2.523,1.494 2.488,1.517 2.452,1.538 2.415,1.557 2.376,1.574 2.337,1.589 2.298,1.602 2.257,1.613 2.216,1.622 2.175,1.628 2.133,1.633 2.091,1.635 2.049,1.635 2.007,1.633 1.966,1.628 1.924,1.622 1.883,1.613 1.843,1.602 1.803,1.589 1.764,1.574 1.726,1.557 1.688,1.538 1.652,1.517 1.617,1.494 1.583,1.47
  Top Layer region: 2.558,0.201 2.343,0.416 2.343,0.416 2.315,0.399 2.287,0.384 2.258,0.372 2.228,0.361 2.197,0.351 2.166,0.344 2.134,0.339 2.102,0.336 2.07,0.335 2.038,0.336 2.007,0.339 1.975,0.344 1.944,0.351 1.913,0.361 1.883,0.372 1.854,0.384 1.825,0.399 1.798,0.416 1.583,0.201 1.583,0.201 1.617,0.176 1.652,0.153 1.688,0.132 1.726,0.113 1.764,0.096 1.803,0.081 1.843,0.068 1.884,0.057 1.925,0.049 1.966,0.042 2.008,0.038 2.049,0.035 2.091,0.035 2.133,0.038 2.175,0.042 2.216,0.049 2.257,0.057 2.298,0.068 2.338,0.081 2.377,0.096 2.415,0.113 2.452,0.132 2.489,0.153 2.524,0.176 2.558,0.201
  Top Layer region: 2.705,1.322 2.49,1.107 2.49,1.107 2.506,1.08 2.521,1.052 2.534,1.022 2.545,0.992 2.554,0.962 2.561,0.931 2.566,0.899 2.569,0.867 2.57,0.835 2.569,0.803 2.566,0.771 2.561,0.74 2.554,0.709 2.545,0.678 2.534,0.648 2.521,0.619 2.506,0.59 2.49,0.563 2.705,0.348 2.705,0.348 2.729,0.382 2.752,0.417 2.773,0.453 2.792,0.491 2.809,0.529 2.824,0.568 2.837,0.608 2.848,0.648 2.857,0.689 2.863,0.731 2.868,0.772 2.87,0.814 2.87,0.856 2.868,0.898 2.863,0.94 2.857,0.981 2.848,1.022 2.837,1.062 2.824,1.102 2.809,1.141 2.792,1.18 2.773,1.217 2.752,1.253 2.729,1.288 2.705,1.322
  Board Outline Layer circle w0.025: c2.07,0.835 r0.3
  Board Outline Layer region: 2.37,0.835 2.34,0.705 2.257,0.6 2.137,0.543 2.003,0.543 1.883,0.6 1.8,0.705 1.77,0.835 1.77,0.835 1.8,0.965 1.883,1.07 2.003,1.127 2.137,1.127 2.257,1.07 2.34,0.965 2.37,0.835
  Multi-Layer board cut-out: 2.37,0.835 2.34,0.705 2.257,0.6 2.137,0.543 2.003,0.543 1.883,0.6 1.8,0.705 1.77,0.835 1.77,0.835 1.8,0.965 1.883,1.07 2.003,1.127 2.137,1.127 2.257,1.07 2.34,0.965 2.37,0.835
  silkscreen extent -0.39,-0.95 3.11,2.19
Single_Pin [mm]
  round 2 hole 1.2: 1(0,0)
  silkscreen extent -1.5,-1.5 1.5,1.5
SMA_L4.3-W2.6-LS5.2-RD [mm]
  rect 2x2 smd: 1(-2.2,0) 2(2.2,0)
  silkscreen extent -2.98,-1.5 2.6,1.5
SOD-523_L1.2-W0.8-LS1.6-RD [mm]
  rect 0.93x0.36 smd: 1(-0.635,0) 2(0.635,0)
  silkscreen extent -0.91,-0.55 0.68,0.55
SOP-8_L4.9-W3.9-P1.27-LS6.0-BL [mm]
  oval 0.63x1.865 smd: 1(-1.905,-2.682) 2(-0.635,-2.682) 3(0.635,-2.682) 4(1.905,-2.682) 5(1.905,2.682) 6(0.635,2.682) 7(-0.635,2.682) 8(-1.905,2.682)
  silkscreen extent -2.82,-2.83 2.58,1.52
sop-8_l5.0-w4.0-p1.27-ls6.2-bl [mm]
  oval 0.701x1.699 smd: 1(-1.905,-2.901) 2(-0.635,-2.901) 3(0.635,-2.901) 4(1.905,-2.901) 5(1.905,2.901) 6(0.635,2.901) 7(-0.635,2.901) 8(-1.905,2.901)
  silkscreen extent -2.99,-2.71 2.5,2
SOT-23-3_L2.9-W1.3-P1.90-LS2.4-BR [mm]
  rect 1.25x0.7 smd: 1(1,-0.95) 2(1,0.95) 3(-1,0)
  silkscreen extent -0.73,-1.53 0.73,1.53
SOT-23-3_L2.9-W1.4-P1.90-LS2.6-BR [mm]
  rect 0.91x0.6 smd: 1(1.055,-0.955) 2(1.055,0.955) 3(-1.055,0)
  silkscreen extent -0.78,-1.6 1.09,1.53
SOT-23-3_L2.9-W1.6-P1.90-LS2.8-BR [mm]
  rect 1.07x0.6 smd: 1(1.235,-0.95) 2(1.235,0.95) 3(-1.235,0)
  silkscreen extent -0.88,-1.54 0.88,1.54
SOT-23-5_L3.0-W1.7-P0.95-LS2.8-BR [mm]
  rect 1x0.6 smd: 1(1.3,-0.95) 2(1.3,0) 3(1.3,0.95) 4(-1.3,0.95) 5(-1.3,-0.95)
  silkscreen extent -0.9,-1.78 1.65,1.55
SOT-23-6_L2.9-W1.6-P0.95-LS2.8-BR [mm]
  rect 1x0.55 smd: 1(1.4,-0.95) 2(1.4,0) 3(1.4,0.95) 4(-1.4,0.95) 5(-1.4,0) 6(-1.4,-0.95)
  silkscreen extent -0.9,-1.78 1.52,1.55
SOT-23_L2.9-W1.3-P1.90-LS2.4-BR [mm]
  rect 1x0.8 smd: 1(1.15,-0.95) 2(1.15,0.95) 3(-1.15,0)
  silkscreen extent -0.7,-1.5 0.7,1.5
SOT-89-3_L4.5-W2.5-P1.50-LS4.2-BR [mm]
  rect 1.575x0.672 smd: 1(1.356,-1.5) 3(1.356,1.5)
  round 0.38 smd: 2(-1.356,0)
  Top Layer region: -2.283,0.95 -0.429,0.95 -0.384,0.949 -0.34,0.946 -0.296,0.94 -0.252,0.933 -0.208,0.924 -0.165,0.912 -0.123,0.899 -0.081,0.884 -0.04,0.866 0,0.847 0.04,0.826 0.078,0.803 0.115,0.779 0.151,0.752 0.185,0.724 0.219,0.695 0.251,0.664 0.281,0.631 0.31,0.597 0.337,0.562 0.362,0.525 0.386,0.488 0.408,0.449 0.428,0.409 0.447,0.33 2.144,0.33 2.144,-0.33 0.447,-0.33 0.428,-0.409 0.408,-0.449 0.386,-0.488 0.362,-0.526 0.337,-0.562 0.31,-0.597 0.281,-0.631 0.251,-0.664 0.219,-0.695 0.185,-0.725 0.151,-0.753 0.115,-0.779 0.078,-0.804 0.04,-0.827 0,-0.848 -0.04,-0.867 -0.081,-0.884 -0.123,-0.899 -0.165,-0.913 -0.208,-0.924 -0.252,-0.934 -0.296,-0.941 -0.34,-0.946 -0.384,-0.949 -0.429,-0.95 -2.283,-0.95 -2.328,-0.949 -2.372,-0.946 -2.416,-0.941 -2.46,-0.934 -2.504,-0.924 -2.547,-0.913 -2.589,-0.899 -2.631,-0.884 -2.672,-0.867 -2.713,-0.848 -2.752,-0.827 -2.79,-0.804 -2.827,-0.779 -2.863,-0.753 -2.898,-0.725 -2.931,-0.695 -2.963,-0.664 -2.993,-0.631 -3.022,-0.597 -3.049,-0.562 -3.075,-0.526 -3.098,-0.488 -3.12,-0.449 -3.141,-0.409 -3.159,-0.369 -3.175,-0.327 -3.189,-0.285 -3.202,-0.242 -3.212,-0.199 -3.22,-0.155 -3.227,-0.111 -3.231,-0.067 -3.233,-0.022 -3.233,0.022 -3.231,0.067 -3.227,0.111 -3.22,0.155 -3.212,0.199 -3.202,0.242 -3.189,0.285 -3.175,0.327 -3.159,0.369 -3.141,0.409 -3.12,0.449 -3.098,0.488 -3.075,0.525 -3.049,0.562 -3.022,0.597 -2.993,0.631 -2.963,0.664 -2.931,0.695 -2.898,0.724 -2.863,0.752 -2.827,0.779 -2.79,0.803 -2.752,0.826 -2.713,0.847 -2.672,0.866 -2.631,0.884 -2.589,0.899 -2.547,0.912 -2.504,0.924 -2.46,0.933 -2.416,0.94 -2.372,0.946 -2.328,0.949
  silkscreen extent -1.95,-2.33 0.7,2.33
SW-TH_TC-1102N-C-A-B [mm]
  round 1.801 hole 1.199: 1(-2.25,-1.349) 2(2.25,-1.349)
  round 2.2 hole 1.501: 3(-3.5,1.351) 4(3.5,1.351)
  silkscreen extent -3.7,-5.25 3.7,2.79
TF-01A [mil]
  rect 23.6x51.2 smd: 1(88.2,282.1) 2(44.9,282.1) 3(1.6,282.1) 4(-41.7,282.1) 5(-85,282.1) 6(-128.3,282.1) 7(-171.6,282.1) 8(-214.9,282.1) 9(-258.2,282.1)
  rect 47.2x55.1 smd: 10(-305.5,248.6) 13(272.5,248.6)
  rect 47.2x78.7 smd: 11(-305.5,-133.4) 12(305.5,-133.4)
  Board Outline Layer lines w1: -214.5,-144.8 -214.2,-148.6 -213,-152.3 -211.2,-155.7 -208.8,-158.7 -205.8,-161.2 -202.4,-163 -198.7,-164.1 -194.8,-164.5 -191,-164.1 -187.3,-163 -183.9,-161.2 -180.9,-158.7 -178.5,-155.7 -176.7,-152.3 -175.5,-148.6 -175.2,-144.8 -175.5,-140.9 -176.7,-137.3 -178.5,-133.8 -180.9,-130.9 -183.9,-128.4 -187.3,-126.6 -191,-125.5 -194.8,-125.1 -198.7,-125.5 -202.4,-126.6 -205.8,-128.4 -208.8,-130.9 -211.2,-133.8 -213,-137.3 -214.2,-140.9 -214.5,-144.8 ; 100.45,-144.73 100.75,-148.53 101.95,-152.23 103.75,-155.63 106.15,-158.63 109.15,-161.13 112.55,-162.93 116.25,-164.03 120.15,-164.43 123.95,-164.03 127.65,-162.93 131.05,-161.13 134.05,-158.63 136.45,-155.63 138.25,-152.23 139.45,-148.53 139.75,-144.73 139.45,-140.83 138.25,-137.23 136.45,-133.73 134.05,-130.83 131.05,-128.33 127.65,-126.53 123.95,-125.43 120.15,-125.03 116.25,-125.43 112.55,-126.53 109.15,-128.33 106.15,-130.83 103.75,-133.73 101.95,-137.23 100.75,-140.83 100.45,-144.73
  Board Outline Layer region: -175.2,-144.8 -175.5,-148.6 -176.7,-152.3 -178.5,-155.7 -180.9,-158.7 -183.9,-161.2 -187.3,-163 -191,-164.1 -194.8,-164.5 -198.7,-164.1 -202.4,-163 -205.8,-161.2 -208.8,-158.7 -211.2,-155.7 -213,-152.3 -214.2,-148.6 -214.5,-144.8 -214.2,-140.9 -213,-137.3 -211.2,-133.8 -208.8,-130.9 -205.8,-128.4 -202.4,-126.6 -198.7,-125.5 -194.8,-125.1 -191,-125.5 -187.3,-126.6 -183.9,-128.4 -180.9,-130.9 -178.5,-133.8 -176.7,-137.3 -175.5,-140.9
  Board Outline Layer region: 139.75,-144.73 139.45,-148.53 138.25,-152.23 136.45,-155.63 134.05,-158.63 131.05,-161.13 127.65,-162.93 123.95,-164.03 120.15,-164.43 116.25,-164.03 112.55,-162.93 109.15,-161.13 106.15,-158.63 103.75,-155.63 101.95,-152.23 100.75,-148.53 100.45,-144.73 100.75,-140.83 101.95,-137.23 103.75,-133.73 106.15,-130.83 109.15,-128.33 112.55,-126.53 116.25,-125.43 120.15,-125.03 123.95,-125.43 127.65,-126.53 131.05,-128.33 134.05,-130.83 136.45,-133.73 138.25,-137.23 139.45,-140.83
  Multi-Layer board cut-out: -175.2,-144.8 -175.5,-148.6 -176.7,-152.3 -178.5,-155.7 -180.9,-158.7 -183.9,-161.2 -187.3,-163 -191,-164.1 -194.8,-164.5 -198.7,-164.1 -202.4,-163 -205.8,-161.2 -208.8,-158.7 -211.2,-155.7 -213,-152.3 -214.2,-148.6 -214.5,-144.8 -214.2,-140.9 -213,-137.3 -211.2,-133.8 -208.8,-130.9 -205.8,-128.4 -202.4,-126.6 -198.7,-125.5 -194.8,-125.1 -191,-125.5 -187.3,-126.6 -183.9,-128.4 -180.9,-130.9 -178.5,-133.8 -176.7,-137.3 -175.5,-140.9
  Multi-Layer board cut-out: 139.75,-144.73 139.45,-148.53 138.25,-152.23 136.45,-155.63 134.05,-158.63 131.05,-161.13 127.65,-162.93 123.95,-164.03 120.15,-164.43 116.25,-164.03 112.55,-162.93 109.15,-161.13 106.15,-158.63 103.75,-155.63 101.95,-152.23 100.75,-148.53 100.45,-144.73 100.75,-140.83 101.95,-137.23 103.75,-133.73 106.15,-130.83 109.15,-128.33 112.55,-126.53 116.25,-125.43 120.15,-125.03 123.95,-125.43 127.65,-126.53 131.05,-128.33 134.05,-130.83 136.45,-133.73 138.25,-137.23 139.45,-140.83
  silkscreen extent -290,-303 290,208
typec-31-e-11 [mil]
  oval 39.4x59.1 hole 36 slot 37.8 at 90 deg: 1(-108.3,-1.15) 6(108.2,-1.15)
  oval 35.4x59.1 hole 31.5 slot 37.8 at 90 deg: 2(-59.9,-1.15) 5(59.8,-1.15)
  oval 28x59.1 hole 23.6 slot 31.5 at 90 deg: 3(-19.7,-1.15) 4(19.7,-1.15)
  oval 39.4x78.7 hole 23.6 slot 63 at 90 deg: 7(-170.1,-15.75) 8(170.1,-15.75)
  silkscreen extent -224,-110 224,110
USB-C-SMD_TYPEC-304S-ACP16 [mm]
  rect 1.8x1.45 smd: 13(-5.07,1.633) 14(5.07,1.633)
  rect 1.8x1.2 smd: 15(-5.07,-2.547) 16(5.07,-2.547)
  rect 0.55x1.45 smd: A1B12(-3.225,2.547) A4B9(-2.45,2.547) B1A12(3.22,2.547) B4A9(2.45,2.547)
  rect 0.3x1.45 smd: A5(-1.26,2.533) A6(-0.25,2.547) A7(0.25,2.547) A8(1.25,2.547) B5(1.75,2.547) B6(0.75,2.547) B7(-0.75,2.547) B8(-1.75,2.547)
  Board Outline Layer circle w0.005: c-2.89,1.102 r0.35
  Board Outline Layer circle w0.005: c2.89,1.102 r0.35
  Board Outline Layer region: -2.89,0.752 -3.042,0.787 -3.164,0.884 -3.231,1.025 -3.231,1.18 -3.164,1.321 -3.042,1.418 -2.89,1.452 -2.89,1.452 -2.738,1.418 -2.616,1.321 -2.549,1.18 -2.549,1.025 -2.616,0.884 -2.738,0.787 -2.89,0.752
  Board Outline Layer region: 2.89,0.752 2.738,0.787 2.616,0.884 2.549,1.025 2.549,1.18 2.616,1.321 2.738,1.418 2.89,1.452 2.89,1.452 3.042,1.418 3.164,1.321 3.231,1.18 3.231,1.025 3.164,0.884 3.042,0.787 2.89,0.752
  Multi-Layer board cut-out: -2.89,0.752 -3.042,0.787 -3.164,0.884 -3.231,1.025 -3.231,1.18 -3.164,1.321 -3.042,1.418 -2.89,1.452 -2.89,1.452 -2.738,1.418 -2.616,1.321 -2.549,1.18 -2.549,1.025 -2.616,0.884 -2.738,0.787 -2.89,0.752
  Multi-Layer board cut-out: 2.89,0.752 2.738,0.787 2.616,0.884 2.549,1.025 2.549,1.18 2.616,1.321 2.738,1.418 2.89,1.452 2.89,1.452 3.042,1.418 3.164,1.321 3.231,1.18 3.231,1.025 3.164,0.884 3.042,0.787 2.89,0.752
  silkscreen extent -4.54,-5.26 4.6,2.35

## Free pads (board coordinates)
  round 1.524 hole 0.914: 1(151.032,139.653)
  round 5 hole 3.2: ""(90.2,94.692) ""(90.2,194.692) ""(122.2,94.692) ""(122.2,194.692)

## Via types
v1: diameter 0.5, hole 0.305, Top Layer to Bottom Layer, 390 vias
v2: diameter 0.61, hole 0.305, Top Layer to Bottom Layer, 2 vias